# Altium PCB HighCurrent-Probe.PcbDoc
Units mm, origin at the board's own origin, x right, y up, seen from the top; angles counter-clockwise.
Board outline 41 x 54 mm, 4 copper layers (Top Layer, MidLayer1, MidLayer2, Bottom Layer), stack 1.57 mm thick; 25 components, 14 nets, 115 pads, 0 vias.
Unrouted connection lines stored in the file: 58.
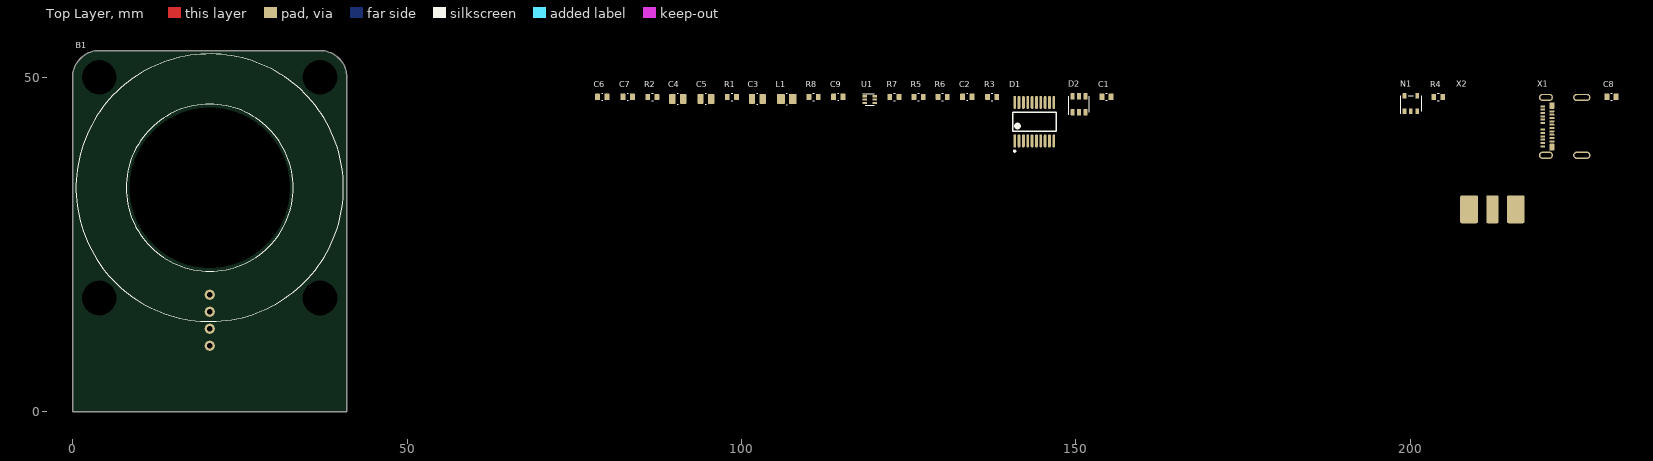
[diagram p0: Top Layer view]
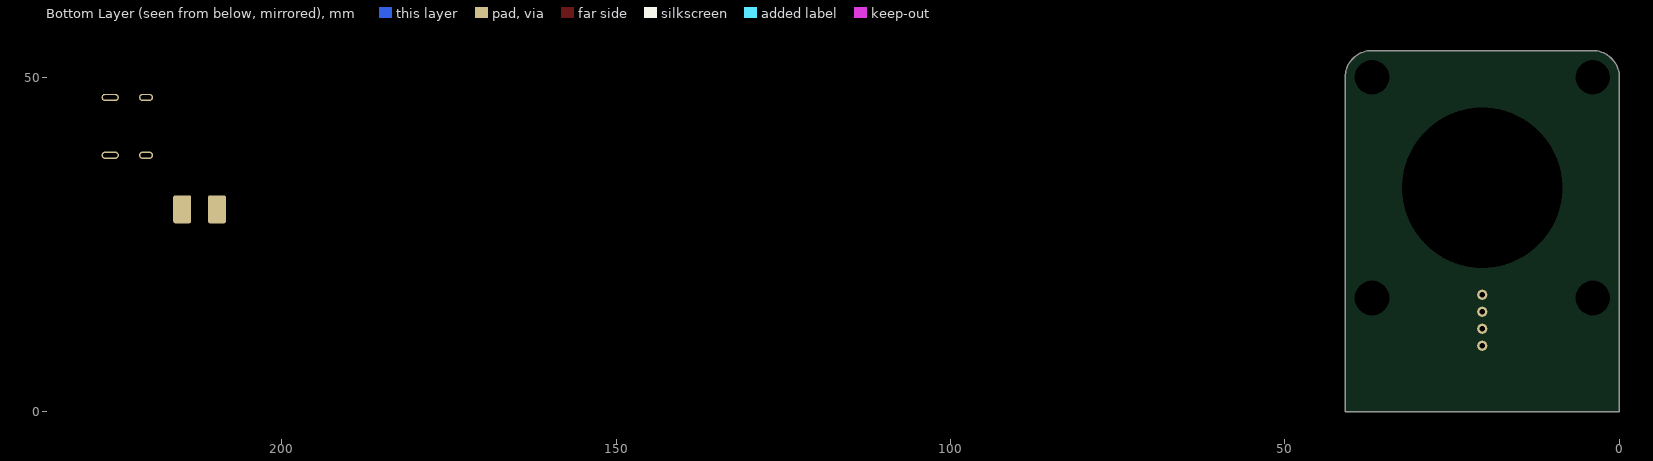
[diagram p1: Bottom Layer view, seen from below]

## Layer stack, top to bottom
Top Solder: solder mask 0.01, Solder Resist, Dk 3.5
Top Layer: signal copper 0.035
Dielectric1: prepreg 0.18, FR-4 (7628), Dk 4.2
Dielectric 2: prepreg 0.18, FR-4 (7628), Dk 4.2
MidLayer1: signal copper 0.035
Core: core 0.71, Dk 4.2
MidLayer2: signal copper 0.035
Dielectric 3: prepreg 0.18, FR-4 (7628), Dk 4.2
Dielectric 4: prepreg 0.18, FR-4 (7628), Dk 4.2
Bottom Layer: signal copper 0.035
Bottom Solder: solder mask 0.01, Solder Resist, Dk 3.5

## Board outline
0,0 0,50 cw(c4,50) 4,54 37,54 cw(c37,50) 41,50 41,0

## Design rules (kind name [scope] priority, off if disabled: settings)
AssemblyTestPointUsage [IsTestpoint] p1:
AssemblyTestpoint [IsTestpoint] p1: testpointundercomponent=TRUE minsize=0.8 maxsize=1.6 preferedsize=0.85 minholesize=0 maxholesize=0 preferedholesize=0 testpointgrid=0.025 usegrid=FALSE gridtolerance=0 allowsidetop=TRUE allowsidebottom=TRUE minspacing=2.54
BoardOutlineClearance [All and not OnLayer('Top Overlay')] p1: gap=0.5 ignorepadtopadclearanceinfootprint=FALSE except(0: Arc-SplitContinuation Track-SplitContinuation SMDPad-SplitContinuation Fill-SplitContinuation Poly-SplitContinuation Region-SplitContinuation Text-SplitContinuation; 1.5: THPad-SplitContinuation Via-SplitContinuation)
Clearance Clearance_NetClasses [InNetClass('PrimarySide') vs InNetClass('SecondarySide')] p1: gap=1 ignorepadtopadclearanceinfootprint=FALSE except(0: Arc-Hole Track-Hole SMDPad-Hole THPad-Hole Via-Hole Fill-Hole Poly-Hole Region-Hole Text-Hole)
Clearance Clearance_Pri-PE [InNetClass('PrimarySide') vs InNet('EARTH') or InNet('EARTH_G2') or InNet('EARTH_USB') or InNet('NetC3_2')] p2: gap=1 ignorepadtopadclearanceinfootprint=FALSE except(0: Arc-Hole Track-Hole SMDPad-Hole THPad-Hole Via-Hole Fill-Hole Poly-Hole Region-Hole Text-Hole)
Clearance Clearance_Sec-PE [InNetClass('SecondarySide') vs InNet('EARTH') or InNet('EARTH_G2') or InNet('EARTH_USB') or InNet('NetC3_2')] p3: gap=0.5 ignorepadtopadclearanceinfootprint=FALSE except(0: Arc-Hole Track-Hole SMDPad-Hole THPad-Hole Via-Hole Fill-Hole Poly-Hole Region-Hole Text-Hole)
Clearance Clearance_KeepOut [OnLayer('Keep-Out Layer')] p4: gap=0.5 ignorepadtopadclearanceinfootprint=FALSE except(0: Arc-Hole Track-Hole SMDPad-Hole THPad-Hole Via-Hole Fill-Hole Poly-Hole Region-Hole Text-Hole)
Clearance Clearance2Holes [not OnTopLayer AND NOT OnBottomLayer vs (ObjectKind = 'Pad') And (Layer = 'MultiLayer') And (PadIsPlated = 'False')] p5: gap=0.5 ignorepadtopadclearanceinfootprint=FALSE except(0: Arc-Hole Track-Hole SMDPad-Hole THPad-Hole Via-Hole Fill-Hole Poly-Hole Region-Hole Text-Hole)
Clearance Clearance_via2via [IsVia vs IsVia] p6: gap=0.15 ignorepadtopadclearanceinfootprint=FALSE
Clearance [All] p7: gap=0.2 ignorepadtopadclearanceinfootprint=FALSE except(0: Arc-Hole Track-Hole SMDPad-Hole THPad-Hole Via-Hole Fill-Hole Poly-Hole Region-Hole Text-Hole)
ComponentClearance [IsComponent] p1: gap=0.254 collisioncheckmode=3 verticalgap=0.254 showdistances=TRUE donotcheckwithout3dbody=TRUE
FabricationTestPointUsage [IsTestpoint] p1: valid=0 allowmultiple=FALSE
FabricationTestpoint [IsTestpoint] p1: side=3 testpointundercomponent=TRUE minsize=0.8 maxsize=1.6 preferedsize=0.85 minholesize=0 maxholesize=0 preferedholesize=0 testpointgrid=0.025 allowsidetop=TRUE allowsidebottom=TRUE usegrid=FALSE gridtolerance=0 minspacing=2.54 boardedgeclearance=1.9
HoleSize [All] p1: absolutevalues=TRUE maxlimit=6.4 minlimit=0.2 maxpercent=80.000 minpercent=20.000
MinimumAnnularRing MinimumAnnularRingVia [IsVia] p1: minimumring=0.15
MinimumAnnularRing MinimumAnnularRingDefault [All] p2: minimumring=0.15
MinimumSolderMaskSliver MinimumSolderMaskSliver_Symbols [IsComponent] p1: minsoldermaskwidth=0
MinimumSolderMaskSliver [All] p2: minsoldermaskwidth=0.1
PlaneClearance PlaneClearance_PE [InNet('EARTH_USB')  or InNet('EARTH_G2') or InNet('NetC3_2') or InNet('EARTH')] p1: clearance=1
PlaneClearance PlaneClearance_Holes-via [(IsVia)] p2: clearance=0.35
PlaneClearance PlaneClearance_Holes-Special [(InComponentClass('SpecialConnector'))] p3: clearance=0.35
PlaneClearance [All] p4: clearance=0.5
PlaneConnect "PlaneConnect_Special Con" [(InComponentClass('SpecialConnector'))] p1: planeconnectstyle=Direct reliefexpansion=0.508 reliefentries=4 reliefconductorwidth=0.254 reliefairgap=0.254
PlaneConnect PlaneConnect_Components [(InComponentClass('All Components'))] p2: planeconnectstyle=Relief reliefexpansion=0.35 reliefentries=4 reliefconductorwidth=0.25 reliefairgap=0.25
PlaneConnect [All] p3: planeconnectstyle=Direct reliefexpansion=0.508 reliefentries=4 reliefconductorwidth=0.254 reliefairgap=0.254
PolygonConnect PolygonConnect_Components [(InComponentClass('All Components'))] p1: connectstyle=Relief reliefconductorwidth=0.254 reliefentries=4 polygonreliefangle="90 Angle" airgapwidth=0.254
PolygonConnect [All] p2: connectstyle=Direct reliefconductorwidth=0.254 reliefentries=4 polygonreliefangle="90 Angle" airgapwidth=0.254
RoutingVias Micro-Vias [((ObjectKind = 'Via') AND (StartLayer = 'Top Layer') AND (StopLayer = 'InternalPlane1')) OR ((ObjectKind = 'Via') AND (StartLayer = 'Bottom Layer') AND (StopLayer = 'InternalPlane2'))] p1: holewidth=0.15 width=0.35 viastyle="Through Hole" minholewidth=0.15 minwidth=0.35 maxholewidth=0.15 maxwidth=0.35
RoutingVias [All] p2: holewidth=0.2 width=0.55 viastyle="Through Hole" minholewidth=0.2 minwidth=0.55 maxholewidth=0.3 maxwidth=0.7
SilkToSilkClearance [All] p1: silktosilkclearance=0.2
SilkToSolderMaskClearance SilkToPadClearance [IsPad] p1: minsilkscreentomaskgap=0.2 clearancetoexposedcopper=TRUE
SolderMaskExpansion SolderMaskExpansionVias [IsVia] p1: expansion=0.15 istentingtop=FALSE soldermaskfromhole=TRUE
SolderMaskExpansion SolderMaskExpansionHoles [(ObjectKind = 'Pad') And (PadIsPlated = 'False') And (AsMM(PadXSize_AllLayers) = 0) And (AsMM(PadYSize_AllLayers) = 0)] p2: expansion=0.05 istentingtop=FALSE soldermaskfromhole=TRUE
SolderMaskExpansion SolderMaskExpansionSTD [IsPad  Or IsRegion] p3: expansion=0.05 istentingtop=FALSE
ViasUnderSMD ViasUnderSMD_TP [HasFootprint('TP_1.0mm')] p1: allowed=TRUE
ViasUnderSMD [All] p2: allowed=FALSE
Width [All] p1: maxlimit=2 minlimit=0.15 preferedwidth=0.2 minimp=50.000000 maximp=50.000000 favimp=50.000000
19 further rules are at their usual default settings.

## Classes and differential pairs
component class Through-Hole_Assy: B1 X1 X2
component class Surface_Assy: C1 C2 C3 C4 C5 C6 C7 C8 C9 D1 D2 L1 N1 R1 R2 R3 R4 R5 R6 R7 R8 U1

## Components (designator, comment, footprint, x,y, rotation, side; value= is the part's Value field where it differs from the comment)
B1 "HTFS 800-P" "HTFS 800-P" 20.5,33.5 r0 top locked
C1 "Cap 100n 0603" C-0603_1608_095_L_RF 154.573,47.075 r0 top value=100nF
C2 "Cap 100n 0603" C-0603_1608_095_L_RF 133.773,47.075 r0 top value=100nF
C3 "Cap 10u 0805" C-0805_2012_155_L_RF 102.373,46.775 r0 top value=10µF
C4 "Cap 10u 0805" C-0805_2012_155_L_RF 90.473,46.775 r0 top value=10µF
C5 "Cap 10u 0805" C-0805_2012_155_L_RF 94.673,46.775 r0 top value=10µF
C6 "Cap 100n 0603" C-0603_1608_095_L_RF 79.173,47.075 r0 top value=100nF
C7 "Cap 100n 0603" C-0603_1608_095_L_RF 82.973,47.075 r0 top value=100nF
C8 "Cap 10p 0603" C-0603_1608_095_L_RF 230.072,47.075 r0 top value=10pF
C9 "Cap 100n 0603" C-0603_1608_095_L_RF 114.473,47.075 r0 top value=100nF
D1 "STM32G030F6P6" TSSOP20_N_RF 143.773,43.375 r90 top
D2 "MCP4726A0T" SOT23-6_N_RF 150.473,45.975 r0 top
L1 "1uH" L_0805_N_RF 106.773,46.775 r0 top
N1 "LMC7101AIM5X" SOT23-5_L_RF 200.073,46.075 r0 top value=LM78L12ACM
R1 "Res 68k 0603" R-0603_1608_050_L_RF 98.573,47.075 r0 top value=68k
R2 "Res 15k 0603" R-0603_1608_050_L_RF 86.673,47.075 r0 top value=15k
R3 "Res 1k 0603" R-0603_1608_050_L_RF 137.473,47.075 r0 top value=1k
R4 "Res 1k 0603" R-0603_1608_050_L_RF 204.173,47.075 r0 top value=1k
R5 "Res 5k1 0603" R-0603_1608_050_L_RF 126.473,47.075 r0 top value=5.1k
R6 "Res 5k1 0603" R-0603_1608_050_L_RF 130.073,47.075 r0 top value=5.1k
R7 "Res 10k 0603" R-0603_1608_050_L_RF 122.873,47.075 r0 top value=10k
R8 "Res 1k 0603" R-0603_1608_050_L_RF 110.773,47.075 r0 top value=1k
U1 "TPS62A01A" SOT-563_N_RF 119.173,46.675 r0 top
X1 "105450-0101" 105450-0101 220.272,42.675 r90 top
X2 "73251-2120" 73251-2120 212.272,30.275 r0 top

## Footprints (in the part's own frame and the unit in brackets; to place one, negate y for a bottom-side part, rotate by r counter-clockwise, add the part's x,y. Pads: shape width x height; smd on the part's side, far side on the other; paste and mask are expansions set on the pad)
73251-2120 [mm] "SMA Connector"
  rrect20% 1.78x4.19 smd: 1(0,0)
  rrect20% 2.665x4.19 smd: 2(-3.492,0) 2(3.492,0)
  rrect20% 2.665x4.19 smd far side: 2(-2.6,0) 2(2.6,0)
  body extent -3.2,-0.8 3.2,17.5, height 3.9
105450-0101 [mm] "USB-C Connector"
  rrect20% 0.3x0.7 smd: A1(-3,0.46) A2(-2.5,0.46) A3(-2,0.46) A4(-1.5,0.46) A5(-1,0.46) A6(-0.5,0.46) A7(0.5,0.46) A8(1,0.46) A9(1.5,0.46) A10(2,0.46) A11(2.5,0.46) A12(3,0.46) B2(2.25,-0.89) B3(1.75,-0.89) B4(1.25,-0.89) B5(0.75,-0.89) B6(0.25,-0.89) B7(-0.25,-0.89) B8(-0.75,-0.89) B9(-1.25,-0.89) B10(-1.75,-0.89) B11(-2.25,-0.89)
  rrect20% 1x0.7 smd mask+0.15: B1(3.1,-0.89) B12(-3.1,-0.89)
  oval 1.1x2.6 hole 0.6 slot 2.1 at 90 deg: S(-4.32,-5.36) S(4.32,-5.36)
  oval 1.1x2.1 hole 0.6 slot 1.6 at 90 deg mask+0.102: S(-4.32,0) S(4.32,0)
  body extent -4.47,-7.3 4.47,0.6, height 3.18
C-0603_1608_095_L_RF [mm] "Capacitor Chip 0603 Reflow; IPC7351C; Least; A.0"
  rrect20% 0.75x0.96 smd: 1(-0.7,0) 2(0.7,0)
  silkscreen extent -0.08,-0.52 0.08,0.52, body extent -0.87,-0.48 0.88,0.48, height 0.95
C-0805_2012_155_L_RF [mm] "Capacitor Chip 0805 Reflow; IPC7351C; Least; A.0"
  rrect20% 0.95x1.45 smd: 1(-0.8,0) 2(0.8,0)
  silkscreen extent -0.09,-0.83 0.09,0.84, body extent -1.1,-0.72 1.11,0.73, height 1.55
"HTFS 800-P" [mil] "Current Sensor"
  round 60 hole 30: 1(0,-629.92) 2(0,-729.92) 3(0,-829.92) 4(0,-929.92)
  round 60 hole 204.72 unplated: 10(-649.61,-649.61) 10(-649.61,649.61) 10(649.61,-649.61) 10(649.61,649.61)
  round 60 hole 944.88 unplated: 10(0,0)
  silkscreen extent -787,-787 787,787, body extent -787,-1024 787,787, height 669
L_0805_N_RF [mm]
  rrect20% 1.19x1.47 smd: 1(-0.89,0) 2(0.89,0)
  silkscreen extent -0.1,-0.86 0.1,0.86, body extent -1.1,-0.72 1.1,0.73, height 0.9
R-0603_1608_050_L_RF [mm] "Resistor Chip 0603 Reflow; IPC7351C; Least; A.1"
  rrect20% 0.7x0.9 smd: 1(-0.685,0) 2(0.685,0)
  silkscreen extent -0.12,-0.58 0.12,0.58, body extent -0.85,-0.45 0.85,0.45, height 0.5
SOT23-5_L_RF [mm] "SOT23, 5-Leads, Body 2.90x2.70mm, Pitch 0.95mm, IPC High Density_A.1"
  rrect20% 0.55x0.8 smd: 1(-0.95,-1.15) 2(0,-1.15) 3(0.95,-1.15) 4(0.95,1.15) 5(-0.95,1.15)
  silkscreen extent -1.51,-1.51 1.56,1.17, body extent -1.55,-1.3 1.55,1.3, height 1.15
SOT23-6_N_RF [mm] "SOT23, 6-Leads, Body 2.90x2.70mm, Pitch 0.95mm, IPC Medium Density"
  rrect20% 0.6x0.95 smd: 1(-0.95,-1.19) 2(0,-1.19) 3(0.95,-1.19) 4(0.95,1.19) 5(0,1.19) 6(-0.95,1.19)
  silkscreen extent -1.53,-1.57 1.53,1.22, body extent -1.55,-1.3 1.55,1.3, height 1.15
SOT-563_N_RF [mm] "SOTFL, 6-Leads, Body 1.60x1.60mm, Pitch 0.50mm, IPC Medium Density"
  rrect20% 0.67x0.3 smd: 1(-0.74,0.5) 2(-0.74,0) 3(-0.74,-0.5) 4(0.74,-0.5) 5(0.74,0) 6(0.74,0.5)
  silkscreen extent -1.07,-0.88 0.65,0.88, body extent -0.8,-0.85 0.8,0.85, height 0.6
TSSOP20_N_RF [mm]
  rect 1.955x0.421 smd mask+0.05: 1(-2.875,2.925)
  rrect100% 1.955x0.421 smd mask+0.05: 2(-2.875,2.275) 3(-2.875,1.625) 4(-2.875,0.975) 5(-2.875,0.325) 6(-2.875,-0.325) 7(-2.875,-0.975) 8(-2.875,-1.625) 9(-2.875,-2.275) 10(-2.875,-2.925) 11(2.875,-2.925) 12(2.875,-2.275) 13(2.875,-1.625) 14(2.875,-0.975) 15(2.875,-0.325) 16(2.875,0.325) 17(2.875,0.975) 18(2.875,1.625) 19(2.875,2.275) 20(2.875,2.925)
  silkscreen extent -4.53,-3.25 1.4,3.25, body extent -4.35,-3.75 4.35,3.75, height 0.25

## Part data
B1: "IC Current Sensor ±1200A 5V", Case/Package=-, Manufacturer=LEM, ClassName=Through-Hole_Assy, Footprint_validated=No, GPV_Number=xxxx.xxxx, Manufacturer Part Number="HTFS 800-P", MNL_Number=xxxxxxxx, Part_validated=No, PartStatus=New, System=-, Technology=THT
C1 C2 C6 C7 C9: library part CMP-001-0037-3, "Cap Cer SMD 100n 50V 10% 0603 X7R", Case / Package=0603, Manufacturer=KEMET, Manufacturer Part Number=C0603C104K5RAC, ClassName=Surface_Assy, GPV_Number=1749.0075, MNL_Number=22310507, PartStatus=Release, Prefered=true, Technology=SMT, User=epph
C3 C4 C5: library part CMP-00147-1, "Cap Cer SMD 10u 16V 10% 0805 X7R", Case / Package=0805, Manufacturer=Yageo, Manufacturer 2=SAMSUNG, Manufacturer Part Number=CC0805KKX7R7BB106, Manufacturer Part Number 2=CL21B106KOQNNN, ClassName=Surface_Assy, GPV_Number=1750.0364, PartStatus=Release, Prefered=true, Technology=SMT, User=epph
C8: library part CMP-001-0041-2, "Cap Cer SMD 10p 50V +/- 0.25pF  0603 C0G", Case / Package=0603, Manufacturer=AVX, Manufacturer Part Number=06035A100CAT*, ClassName=Surface_Assy, ComponentLink1Description=Datasheet, ComponentLink1URL=https://datasheet.ciiva.com/11464/ccog-11464569.pdf, GPV_Number=1749.0090, PartStatus=Release, Prefered=true, Technology=SMT, User=zupa
D1: "IC MCU Cortex M0+ 32K Flash, 8K RAM, 64MHz", Case/Package=TSSOP20, Manufacturer=ST, Supplier Part Number 1=STM32G030F6P6TR, ClassName=Surface_Assy, Footprint_validated=No, GPV_Number=xxxx.xxxx, Manufacturer Part Number=STM32G030F6P6, MNL_Number=xxxxxxxx, Part_validated=No, PartStatus=New, Supplier 1="Arrow Electronics", System=-, Technology=SMT
D2: "IC DAC I2C 12Bit 2.7V-5.5V", Case/Package=SOT-23-6, Manufacturer=Microchip, ClassName=Surface_Assy, Footprint_validated=No, GPV_Number=xxxx.xxxx, Manufacturer Part Number=MCP4726A0T, MNL_Number=xxxxxxxx, Part_validated=No, PartStatus=New, System=-, Technology=SMT
L1: library part MPH201210S1R0, "Inductor 1uH 0.95A", Case/Package=0805, Manufacturer=Sunlord, ClassName=Surface_Assy, Footprint_validated=No, GPV_Number=xxxx.xxxx, Manufacturer Part Number=MPH201210S1R0, MNL_Number=xxxxxxxx, Part_validated=No, PartStatus=New, System=-, Technology=SMT
N1: library part CMP-001-1191-2, "Low Power OP Rail to Rail", Case / Package=SOT23-5, Manufacturer="Texas Instrument", ClassName=Surface_Assy, GPV_Number=1500.1871, Manufacturer Part Number=LMC7101AIM5X, PartStatus=Release, Technology=SMT, User=zupa
R1: library part CMP-001-0280-3, "Res SMD 68k 1% 0.1W 0603", Case / Package=0603, Manufacturer=YAGEO, Manufacturer Part Number=RC0603FR-0768KL, ClassName=Surface_Assy, ComponentLink1Description=Datasheet, ComponentLink1URL=https://datasheet.ciiva.com/11808/0900766b80f96399-11808280.pdf, GPV_Number=1922.1473, PartStatus=Release, Prefered=true, Technology=SMT, User=zupa
R2: library part CMP-001-0247-3, "Res SMD 15k 1% 0.1W 0603", Case / Package=0603, Manufacturer=YAGEO, Manufacturer Part Number=RC0603FR-0715KL, ClassName=Surface_Assy, ComponentLink1Description=Datasheet, ComponentLink1URL=https://datasheet.ciiva.com/11808/0900766b80f96399-11808280.pdf, GPV_Number=1922.0034, PartStatus=Release, Prefered=true, Technology=SMT, User=zupa
R3 R4 R8: library part CMP-001-0250-3, "Res SMD 1k 1% 0.1W 0603", Case / Package=0603, Manufacturer=YAGEO, Manufacturer Part Number=RC0603FR-071KL, ClassName=Surface_Assy, ComponentLink1Description=Datasheet, ComponentLink1URL=https://datasheet.ciiva.com/11808/0900766b80f96399-11808280.pdf, GPV_Number=1922.0011, MNL_Number=15310012, PartStatus=Release, Prefered=true, Technology=SMT, User=zupa
R5 R6: library part CMP-001-0582-3, "Res SMD 5k1 1% 0.1W 0603", Case / Package=0603, Manufacturer=YAGEO, Manufacturer Part Number=RC0603FR-075K1L, ClassName=Surface_Assy, ComponentLink1Description=Datasheet, ComponentLink1URL=https://datasheet.ciiva.com/8895/pyu-rc0603-51-rohs-l-4-8895189.pdf, GPV_Number=1922.0144, PartStatus=Release, Prefered=true, Technology=SMT, User=napa
R7: library part CMP-001-0241-3, "Res SMD 10k 1% 0.1W 0603", Case / Package=0603, Manufacturer=YAGEO, Manufacturer Part Number=RC0603FR-0710KL, ClassName=Surface_Assy, ComponentLink1Description=Datasheet, ComponentLink1URL=https://datasheet.ciiva.com/11808/0900766b80f96399-11808280.pdf, GPV_Number=1922.0100, MNL_Number=15310022, PartStatus=Release, Prefered=true, Technology=SMT, User=zupa
U1: "IC BUCK 1A 2.5-5.5Vin 2.4MHz", Case/Package=SOT563, Manufacturer=TI, Manufacturer Part Number=TPS62A01ADRLR, Supplier Part Number 1=595-TPS62A01ADRLR, ClassName=Surface_Assy, CPN=10018707-E, LPN=1291853, Supplier 1=Mouser, System=-, Technology=SMT
X1: "CONN USB-C 16pin", Case/Package=USB-C, Manufacturer=Molex, ClassName=Through-Hole_Assy, Footprint_validated=No, GPV_Number=xxxx.xxxx, Manufacturer Part Number=105450-0101, MNL_Number=xxxxxxxx, Part_validated=No, PartStatus=New, System=Connector, Technology=SMT
X2: "CONN RF SMA", Case/Package=SMA, Manufacturer=MOLEX, ClassName=Through-Hole_Assy, Footprint_validated=No, GPV_Number=xxxx.xxxx, Manufacturer Part Number=73251-2120, MNL_Number=xxxxxxxx, Part_validated=No, PartStatus=New, System=Connector, Technology=THT

## Nets (pads, with @x,y where several pads share a name; then routed paths per layer and width w, separated by ;. In a path a pad name is that pad's centre, name@x,y a point inside that pad or via, vN(x,y) a via of type N, cw(c..) or ccw(c..) an arc to the next point about the centre after c; other vN are vias at no path point)
+3V3: C4.2 C5.2 C6.2 C7.2 D1.4 L1.2 N1.2 R1.2 R7.2
+5V: B1.1 C1.2 C2.2 C3.2 D2.3 D2.6 U1.3 U1.4 X1.A4 X1.A9 X1.B4 X1.B9
GND: B1.2 C1.1 C2.1 C3.1 C4.1 C5.1 C6.1 C7.1 C9.1 D1.5 D2.2 N1.5 R2.1 R5.1 R6.1 R8.1 U1.1 X1.A1 X1.A12 X1.B1 X1.B12 X1.S
NetB1_3: B1.3 N1.3
NetB1_4: B1.4 R3.1
NetC8_1: C8.1 N1.4 R4.1
NetC8_2: C8.2 N1.1 R4.2
NetC9_2: C9.2 D1.6 R7.1
NetD1_19: D1.19 R8.2
NetD2_1: D2.1 R3.2
NetL1_1: L1.1 U1.2
NetR1_1: R1.1 R2.2 U1.5
NetR5_2: R5.2 X1.B5
NetR6_2: R6.2 X1.A5
pads on no net: B1.10 D1.1 D1.2 D1.3 D1.7 D1.8 D1.9 D1.10 D1.11 D1.12 D1.13 D1.14 D1.15 D1.16 D1.17 D1.18 D1.20 D2.4 D2.5 U1.6 X1.A2 X1.A3 X1.A6 X1.A7 X1.A8 X1.A10 X1.A11 X1.B2 X1.B3 X1.B6 X1.B7 X1.B8 X1.B10 X1.B11 X2.1 X2.2

## Silkscreen, mask and mechanical layers (free items; w line width, h text height)
Board:
  the board outline again, w0.1
Drill Drawing:
  drawing of 289 lines, arcs and shapes, not listed
  text "Symbol" at -102.537,-16.118 h1.83
  text "Count" at -94.913,-16.118 h1.83
  text "Hole Size" at -88.399,-16.118 h1.83
  text "Hole Length" at -79.425,-16.118 h1.83
  text "Plated" at -68.318,-16.118 h1.83
  text "Hole Type" at -61.745,-16.118 h1.83
  text "Drill Layer Pair" at -52.226,-16.118 h1.83
  text "Via/Pad" at -38.893,-16.118 h1.83
  text "Pad Shape" at -31.2,-16.118 h1.83
  text "Layer" at -17.561,-22.899 h1.48
  text "Name" at -11.356,-22.899 h1.48
  text "Material" at 0.638,-22.899 h1.48
  text "Thickness" at 11.42,-22.899 h1.48
  text "Constant" at 20.275,-22.899 h1.48
  text "Gerber" at 28.473,-22.899 h1.48
  text "Board Layer Stack" at 35.515,-22.899 h1.48
  text "Top Overlay" at -11.356,-25.867 h1.48
  text "GTO" at 28.473,-25.867 h1.48
  text "Top Solder" at -11.356,-28.835 h1.48
  text "Solder Resist" at 0.638,-28.835 h1.48
  text "0.010mm" at 11.42,-28.835 h1.48
  text "3.5" at 20.275,-28.835 h1.48
  text "GTS" at 28.473,-28.835 h1.48
  text "1" at -17.561,-31.804 h1.48
  text "Top Layer" at -11.356,-31.804 h1.48
  text "0.035mm" at 11.42,-31.804 h1.48
  text "GTL" at 28.473,-31.804 h1.48
  text "Dielectric1" at -11.356,-34.772 h1.48
  text "FR-4 (7628)" at 0.638,-34.772 h1.48
  text "0.180mm" at 11.42,-34.772 h1.48
  text "4.2" at 20.275,-34.772 h1.48
  text "Dielectric 2" at -11.356,-37.74 h1.48
  text "FR-4 (7628)" at 0.638,-37.74 h1.48
  text "0.180mm" at 11.42,-37.74 h1.48
  text "4.2" at 20.275,-37.74 h1.48
  text "2" at -17.562,-40.708 h1.48
  text "MidLayer1" at -11.356,-40.708 h1.48
  text "0.035mm" at 11.42,-40.708 h1.48
  text "G1" at 28.473,-40.708 h1.48
  text "Core" at -11.356,-43.676 h1.48
  text "0.710mm" at 11.42,-43.676 h1.48
  text "4.2" at 20.275,-43.676 h1.48
  text "3" at -17.561,-46.644 h1.48
  text "MidLayer2" at -11.356,-46.644 h1.48
  text "0.035mm" at 11.42,-46.644 h1.48
  text "G2" at 28.473,-46.644 h1.48
  text "Dielectric 3" at -11.356,-49.612 h1.48
  text "FR-4 (7628)" at 0.638,-49.612 h1.48
  text "0.180mm" at 11.42,-49.612 h1.48
  text "4.2" at 20.275,-49.612 h1.48
  text "Dielectric 4" at -11.356,-52.58 h1.48
  text "FR-4 (7628)" at 0.638,-52.58 h1.48
  text "0.180mm" at 11.42,-52.58 h1.48
  text "4.2" at 20.275,-52.58 h1.48
  text "4" at -17.561,-55.548 h1.48
  text "Bottom Layer" at -11.356,-55.548 h1.48
  text "0.035mm" at 11.42,-55.548 h1.48
  text "GBL" at 28.473,-55.548 h1.48
  text "Bottom Solder" at -11.356,-58.516 h1.48
  text "Solder Resist" at 0.638,-58.516 h1.48
  text "0.010mm" at 11.42,-58.516 h1.48
  text "3.5" at 20.275,-58.516 h1.48
  text "GBS" at 28.473,-58.516 h1.48
  text "Bottom Overlay" at -11.356,-61.484 h1.48
  text "GBO" at 28.473,-61.484 h1.48
  text "Total board thickness:" at -17.561,-64.452 h1.48
  text "1.590mm" at 11.42,-64.452 h1.48